# Altium PCB PCB1.PcbDoc (part 4 of 4)
Units mil, origin at the board's own origin, x right, y up, seen from the top; angles counter-clockwise.
Board outline 4724.41 x 4724.41 mil, 4 copper layers (Top Layer, GND, VCC, Bottom Layer); 291 components, 240 nets, 990 pads, 328 vias.
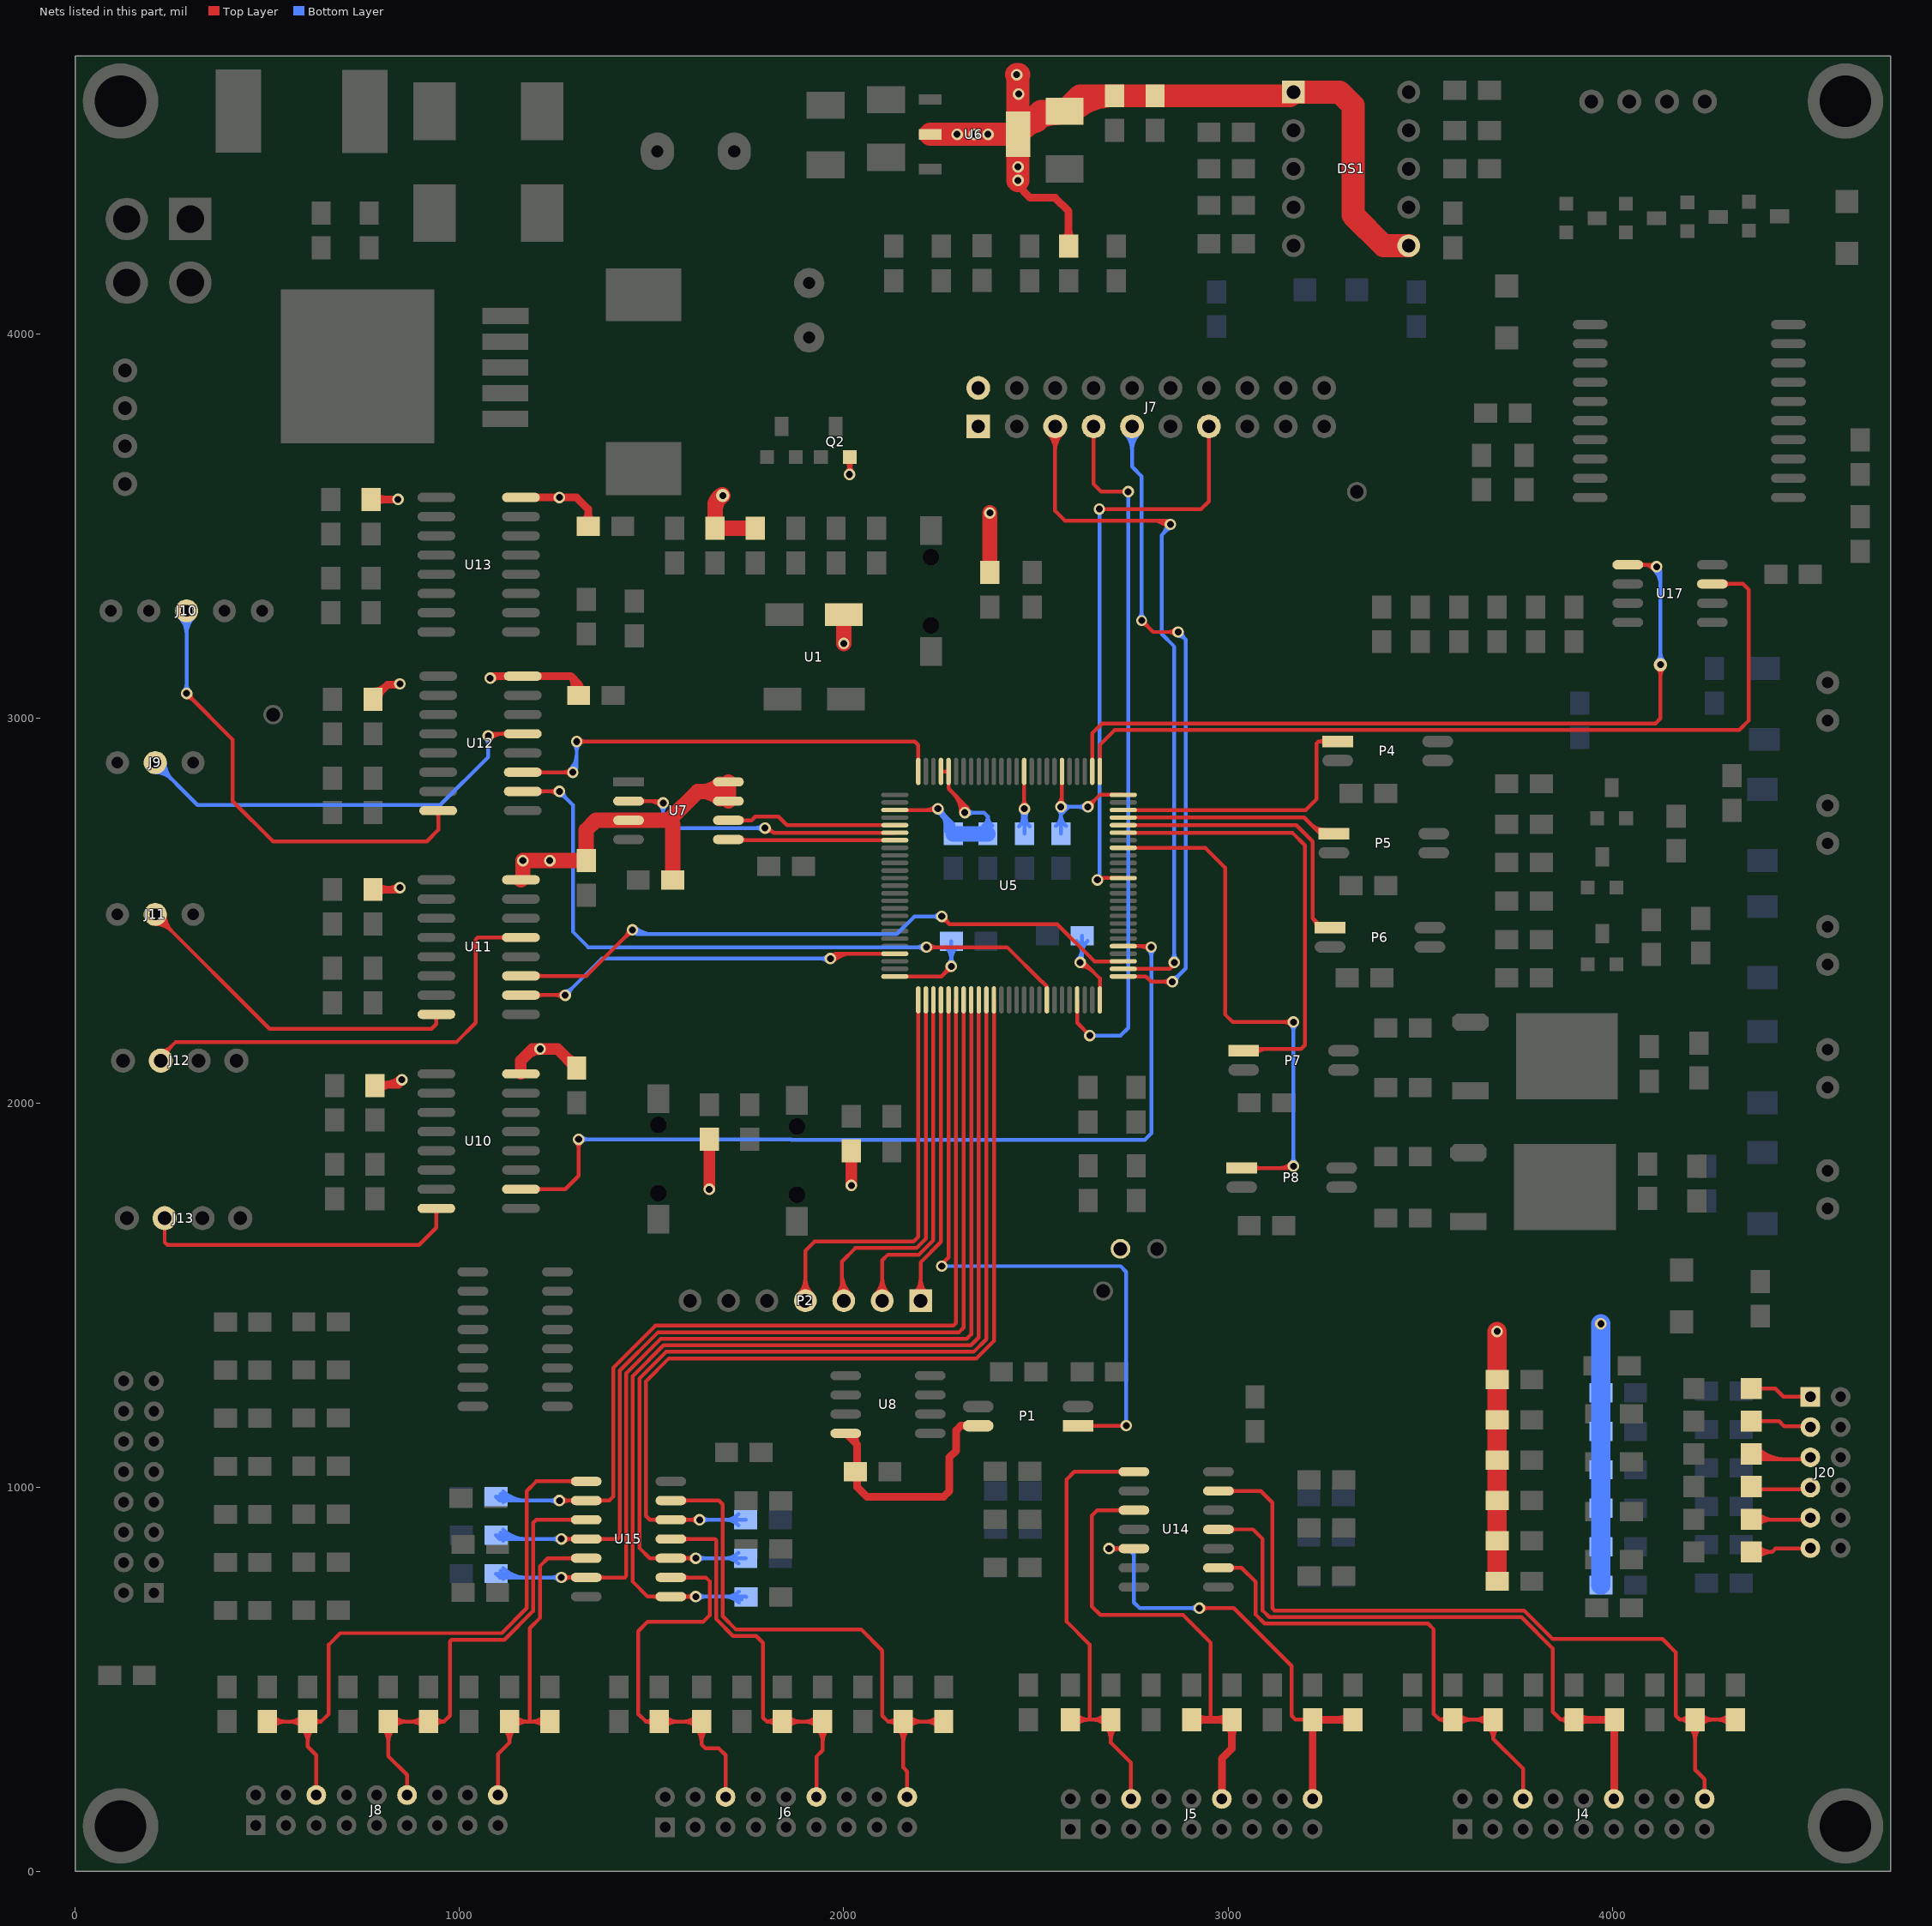
[diagram p6: the nets of this part, all layers, seen from the top]

## Via types
v1: diameter 30, hole 18, Top Layer to Bottom Layer, 301 vias
v2: diameter 35, hole 18, Top Layer to Bottom Layer, 22 vias
v3: diameter 50, hole 28, Top Layer to Bottom Layer, 4 vias
v4: diameter 28, hole 18, Top Layer to Bottom Layer, 1 vias

## Nets (pads, with @x,y where several pads share a name; then routed paths per layer and width w, separated by ;. In a path a pad name is that pad's centre, name@x,y a point inside that pad or via, vN(x,y) a via of type N, cw(c..) or ccw(c..) an arc to the next point about the centre after c; other vN are vias at no path point) (continued)
SENS7: R71.1 U5.61 U15.12 | length 2655.4
  Top Layer w10: U15.12@1517.05,910.05 ccw(c1505.1,898.1) 1505.1,915 ccw(c1505.1,931.9) U15.12@1517.05,919.95 ; U15.12@1582.95,910.05 cw(c1594.9,898.1) 1594.9,915 cw(c1594.9,931.9) U15.12@1582.95,919.95 ; v1@1617.93,907.93 ccw(c1600.86,890.86) 1600.86,915 ccw(c1600.86,939.14) v1@1617.93,922.07 ; v1(1625,915) U15.12@1550,915 1495,915 1485,925 1485,1275 1545,1335 2345,1335 2390.63,1380.63 U5.61@2390.63,2267.76
  Bottom Layer w10: v1(1625,915) R71.1@1745,915 ; v1@1632.07,907.93 cw(c1649.14,890.86) 1649.14,915 cw(c1649.14,939.14) v1@1632.07,922.07 ; R71.1@1725.86,900.86 ccw(c1691.72,866.72) 1691.72,915 ccw(c1691.72,963.28) R71.1@1725.86,929.14
SENS8: R72.1 U5.60 U15.10 | length 2761.4
  Top Layer w10: U15.10@1517.05,810.05 ccw(c1505.1,798.1) 1505.1,815 ccw(c1505.1,831.9) U15.10@1517.05,819.95 ; U15.10@1582.95,810.05 cw(c1594.9,798.1) 1594.9,815 cw(c1594.9,831.9) U15.10@1582.95,819.95 ; v1@1607.93,807.93 ccw(c1590.86,790.86) 1590.86,815 ccw(c1590.86,839.14) v1@1607.93,822.07 ; v1(1615,815) U15.10@1550,815 1495,815 1468,842 1468,1282.04 1537.96,1352 2337.96,1352 2370.94,1384.99 U5.60@2370.94,2267.76
  Bottom Layer w10: v1(1615,815) R72.1@1745,815 ; v1@1622.07,807.93 cw(c1639.14,790.86) 1639.14,815 cw(c1639.14,839.14) v1@1622.07,822.07 ; R72.1@1725.86,800.86 ccw(c1691.72,766.72) 1691.72,815 ccw(c1691.72,863.28) R72.1@1725.86,829.14
SENS9: R73.1 U5.59 U15.8 | length 2892.9
  Top Layer w10: U15.8@1517.05,710.05 ccw(c1505.1,698.1) 1505.1,715 ccw(c1505.1,731.9) U15.8@1517.05,719.95 ; U15.8@1582.95,710.05 cw(c1594.9,698.1) 1594.9,715 cw(c1594.9,731.9) U15.8@1582.95,719.95 ; v1@1607.93,707.93 ccw(c1590.86,690.86) 1590.86,715 ccw(c1590.86,739.14) v1@1607.93,722.07 ; v1(1615,715) U15.8@1550,715 1490,715 1451,754 1451,1289.08 1530.92,1369 2330.92,1369 2351.26,1389.34 U5.59@2351.26,2267.76
  Bottom Layer w10: v1(1615,715) 1745.02,715 R73.1@1745.93,714.09 ; v1@1622.07,707.93 cw(c1639.14,690.86) 1639.14,715 cw(c1639.14,739.14) v1@1622.07,722.07 ; 1690.44,715 cw(c1690.44,663.6) R73.1@1726.79,699.94 ; 1694.85,715 ccw(c1694.85,760.16) R73.1@1726.79,728.23 ; 1714.58,715 cw(c1714.58,687.74) R73.1@1733.86,707.02
SENS10: R74.1 U5.58 U15.6 | length 2959.1
  Top Layer w10: v1(1265,765) U15.6@1330,765 1430,765 1434,769 1434,1296.12 1523.88,1386 2320,1386 2331.57,1397.57 U5.58@2331.57,2267.76 ; v1@1272.07,757.93 cw(c1289.14,740.86) 1289.14,765 cw(c1289.14,789.14) v1@1272.07,772.07 ; U15.6@1297.05,760.05 ccw(c1285.1,748.1) 1285.1,765 ccw(c1285.1,781.9) U15.6@1297.05,769.95 ; U15.6@1362.95,760.05 cw(c1374.9,748.1) 1374.9,765 cw(c1374.9,781.9) U15.6@1362.95,769.95
  Bottom Layer w10: R74.1@1095,775 1105,765 v1(1265,765) ; R74.1@1100,775 ccw(c1124.14,799.14) 1124.14,765 ccw(c1124.14,750.86) R74.1@1114.14,760.86 ; R74.1@1107.07,782.07 ccw(c1148.28,823.28) 1148.28,765 ; R74.1@1114.14,789.14 ccw(c1172.43,847.43) 1172.43,765 ; v1@1257.93,757.93 ccw(c1240.86,740.86) 1240.86,765 ccw(c1240.86,789.14) v1@1257.93,772.07
SENS11: R75.1 U5.57 U15.4 | length 2832.8
  Top Layer w10: v1(1265,865) U15.4@1330,865 1412,865 1417,870 1417,1303.17 1516.83,1403 2300,1403 2311.89,1414.89 U5.57@2311.89,2267.76 ; v1@1272.07,857.93 cw(c1289.14,840.86) 1289.14,865 cw(c1289.14,889.14) v1@1272.07,872.07 ; U15.4@1297.05,860.05 ccw(c1285.1,848.1) 1285.1,865 ccw(c1285.1,881.9) U15.4@1297.05,869.95 ; U15.4@1362.95,860.05 cw(c1374.9,848.1) 1374.9,865 cw(c1374.9,881.9) U15.4@1362.95,869.95
  Bottom Layer w10: R75.1@1095,875 1105,865 v1(1265,865) ; R75.1@1100,875 ccw(c1124.14,899.14) 1124.14,865 ccw(c1124.14,850.86) R75.1@1114.14,860.86 ; R75.1@1107.07,882.07 ccw(c1148.28,923.28) 1148.28,865 ; R75.1@1114.14,889.14 ccw(c1172.43,947.43) 1172.43,865 ; v1@1257.93,857.93 ccw(c1240.86,840.86) 1240.86,865 ccw(c1240.86,889.14) v1@1257.93,872.07
SENS12: R76.1 U5.56 U15.2 | length 2707.1
  Top Layer w10: v1(1260,965) U15.2@1330,965 1390,965 1400,975 1400,1310.21 1509.79,1420 2285,1420 2292.2,1427.2 U5.56@2292.2,2267.76 ; v1@1267.07,957.93 cw(c1284.14,940.86) 1284.14,965 cw(c1284.14,989.14) v1@1267.07,972.07 ; U15.2@1297.05,960.05 ccw(c1285.1,948.1) 1285.1,965 ccw(c1285.1,981.9) U15.2@1297.05,969.95 ; U15.2@1362.95,960.05 cw(c1374.9,948.1) 1374.9,965 cw(c1374.9,981.9) U15.2@1362.95,969.95
  Bottom Layer w10: R76.1@1095,975 1105,965 v1(1260,965) ; R76.1@1100,975 ccw(c1124.14,999.14) 1124.14,965 ccw(c1124.14,950.86) R76.1@1114.14,960.86 ; R76.1@1107.07,982.07 ccw(c1148.28,1023.28) 1148.28,965 ; R76.1@1114.14,989.14 ccw(c1172.43,1047.43) 1172.43,965 ; v1@1252.93,957.93 ccw(c1235.86,940.86) 1235.86,965 ccw(c1235.86,989.14) v1@1252.93,972.07
SENS_POWER: P1.1 U5.55 | length 1715.3
  Top Layer w10: v1@2250,1575 v1(2255,1575) ; v1@2252.5,1577.5 2272.52,1597.52 U5.55@2272.52,2267.76 ; P1.1@2609.69,1159.57 2734.57,1159.57 v1(2735,1160)
  Bottom Layer w10: v1(2255,1575) 2720,1575 2735,1560 v1(2735,1160)
SENSER1: C42.1 J4.18 R42.2 U14.13 | length 2375.5
  Top Layer w10: U14.13@2975,990 3085,990 3115,960 3115,685 3121,679 3770.04,679 3844.04,605 4130,605 4165,570 4165,405 4175,395 ; U14.13@3007.95,985.05 cw(c3019.9,973.1) 3019.9,990 cw(c3019.9,1006.9) U14.13@3007.95,994.95 ; R42.2@4199,383 ccw(c4175,365) 4175,395 ; R42.2@4199,407 cw(c4175,425) 4175,395 ; R42.2@4200.86,375.86 cw(c4166.72,341.72) 4215,341.72 cw(c4263.28,341.72) R42.2@4229.14,375.86 ; R42.2@4229.14,380.86 cw(c4263.28,346.72) 4263.28,395 cw(c4263.28,443.28) R42.2@4229.14,409.14 ; J4.18@4239.92,188.74 4239.92,240.08 4215,265 R42.2@4215,395 ; C42.1@4305.86,380.86 ccw(c4271.72,346.72) 4271.72,395 ccw(c4271.72,443.28) C42.1@4305.86,409.14 ; C42.1@4320,395 R42.2@4215,395 ; 4175,395 R42.2@4215,395
SENSER2: C46.1 J4.12 R40.2 U14.11 | length 1781.9
  Top Layer w10: U14.11@2975,890 3065,890 3090,865 3090,679 3107,662 3763,662 3845,580 3845,415 3865,395 ; U14.11@3007.95,885.05 cw(c3019.9,873.1) 3019.9,890 cw(c3019.9,906.9) U14.11@3007.95,894.95 ; R40.2@3882.77,384.85 ccw(c3865,374.38) 3865,395 ; R40.2@3882.77,405.15 cw(c3865,415.62) 3865,395 ; R40.2@3900,395 3865,395
  Top Layer w20: R40.2@3900,395 C46.1@4005,395 J4.12@4005,180 ; R40.2@3910.61,384.39 cw(c3936.21,358.79) 3936.21,395 cw(c3936.21,431.21) R40.2@3910.61,405.61
SENSER3: C38.1 J4.6 R38.2 U14.9 | length 1584.6
  Top Layer w10: U14.9@2975,790 3035,790 3072,753 3072,668 3095,645 3520,645 3535,630 3535,410 3550,395 ; U14.9@3007.95,785.05 cw(c3019.9,773.1) 3019.9,790 cw(c3019.9,806.9) U14.9@3007.95,794.95 ; R38.2@3567.77,384.85 ccw(c3550,374.38) 3550,395 ; R38.2@3567.77,405.15 cw(c3550,415.62) 3550,395 ; R38.2@3599.14,380.86 cw(c3633.28,346.72) 3633.28,395 cw(c3633.28,443.28) R38.2@3599.14,409.14 ; C38.1@3675.86,380.86 ccw(c3641.72,346.72) 3641.72,395 ccw(c3641.72,443.28) C38.1@3675.86,409.14 ; C38.1@3676.6,375.15 cw(c3649.38,345) 3690,345 ; C38.1@3703.4,375.15 ccw(c3730.62,345) 3690,345 ; J4.6@3767.48,188.74 3767.48,267.52 3690,345 ; 3550,395 R38.2@3585,395 C38.1@3690,395 3690,345
SENSER4: C43.1 J5.18 R36.2 U14.5 | length 1479.5
  Top Layer w10: v1(2690,840) U14.5@2755,840 ; v1@2697.07,832.93 cw(c2714.14,815.86) 2714.14,840 cw(c2714.14,864.14) v1@2697.07,847.07 ; U14.5@2722.05,835.05 ccw(c2710.1,823.1) 2710.1,840 ccw(c2710.1,856.9) U14.5@2722.05,844.95 ; v1(2925,685) 3015,685 3165,535 3165,405 3175,395 R36.2@3220,395 ; v1@2932.07,677.93 cw(c2949.14,660.86) 2949.14,685 cw(c2949.14,709.14) v1@2932.07,692.07
  Top Layer w20: J5.18@3214.92,186.38 3220,191.46 R36.2@3220,395 C43.1@3325,395 ; C43.1@3314.39,384.39 ccw(c3288.79,358.79) 3288.79,395 ccw(c3288.79,431.21) C43.1@3314.39,405.61
  Bottom Layer w10: v1(2690,840) 2740,840 2755,825 2755,700 2770,685 v1(2925,685) ; v1@2697.07,832.93 cw(c2714.14,815.86) 2714.14,840 cw(c2714.14,864.14) v1@2697.07,847.07 ; v1@2917.93,677.93 ccw(c2900.86,660.86) 2900.86,685 ccw(c2900.86,709.14) v1@2917.93,692.07
SENSER5: C47.1 J5.12 R34.2 U14.3 | length 1419.9
  Top Layer w10: U14.3@2722.05,935.05 ccw(c2710.1,923.1) 2710.1,940 ccw(c2710.1,956.9) U14.3@2722.05,944.95 ; U14.3@2755,940 2660,940 2645,925 2645,690 2667.5,667.5 2882.5,667.5 2955,595 2955,395
  Top Layer w20: R34.2@2905,395 2955,395 C47.1@3010,395 3010,320 2983.7,293.7 J5.12@2983.7,188.74 ; R34.2@2915.61,384.39 cw(c2941.21,358.79) 2941.21,395 cw(c2941.21,431.21) R34.2@2915.61,405.61 ; C47.1@2999.39,379.39 cw(c2973.79,353.79) 3010,353.79 cw(c3046.21,353.79) C47.1@3020.61,379.39 ; C47.1@2999.39,384.39 ccw(c2973.79,358.79) 2973.79,395 ccw(c2973.79,431.21) C47.1@2999.39,405.61
SENSER6: C39.1 J5.6 R32.2 U14.1 | length 1420.2
  Top Layer w10: R32.2@2590,395 2640,395 ; R32.2@2604.14,380.86 cw(c2638.28,346.72) 2638.28,395 cw(c2638.28,443.28) R32.2@2604.14,409.14 ; C39.1@2680.86,375.86 cw(c2646.72,341.72) 2695,341.72 cw(c2743.28,341.72) C39.1@2709.14,375.86 ; C39.1@2680.86,380.86 ccw(c2646.72,346.72) 2646.72,395 ccw(c2646.72,443.28) C39.1@2680.86,409.14 ; U14.1@2722.05,1035.05 ccw(c2710.1,1023.1) 2710.1,1040 ccw(c2710.1,1056.9) U14.1@2722.05,1044.95 ; J5.6@2747.48,188.74 2747.48,282.52 2695,335 C39.1@2695,395 2640,395 ; U14.1@2755,1040 2600,1040 2580,1020 2580,650 2640,590 2640,395
SENSER7: C44.1 J6.18 R30.2 U15.13 | length 1728.3
  Top Layer w10: U15.13@1550,965 1675,965 1685,955 1685,664.04 1719.04,630 2045,630 2100,575 2100,405 2115,390 ; U15.13@1582.95,960.05 cw(c1594.9,948.1) 1594.9,965 cw(c1594.9,981.9) U15.13@1582.95,969.95 ; R30.2@2139,378 ccw(c2115,360) 2115,390 ; R30.2@2139,402 cw(c2115,420) 2115,390 ; R30.2@2140.86,370.86 cw(c2106.72,336.72) 2155,336.72 cw(c2203.28,336.72) R30.2@2169.14,370.86 ; J6.18@2164.92,193.74 2164.92,260.08 2155,270 R30.2@2155,390 ; R30.2@2169.14,375.86 cw(c2203.28,341.72) 2203.28,390 cw(c2203.28,438.28) R30.2@2169.14,404.14 ; C44.1@2245.86,375.86 ccw(c2211.72,341.72) 2211.72,390 ccw(c2211.72,438.28) C44.1@2245.86,404.14 ; C44.1@2260,390 R30.2@2155,390 ; 2115,390 R30.2@2155,390
SENSER8: C48.1 J6.12 R28.2 U15.11 | length 1338.8
  Top Layer w10: U15.11@1550,865 1665,865 1668,862 1668,657 1712,613 1772,613 1790,595 1790,400 1800,390 ; U15.11@1582.95,860.05 cw(c1594.9,848.1) 1594.9,865 cw(c1594.9,881.9) U15.11@1582.95,869.95 ; R28.2@1824,378 ccw(c1800,360) 1800,390 ; R28.2@1824,402 cw(c1800,420) 1800,390 ; R28.2@1854.14,375.86 cw(c1888.28,341.72) 1888.28,390 cw(c1888.28,438.28) R28.2@1854.14,404.14 ; J6.12@1928.7,193.74 1928.7,298.7 1945,315 C48.1@1945,390 R28.2@1840,390 1800,390 ; C48.1@1930.86,370.86 cw(c1896.72,336.72) 1945,336.72 cw(c1993.28,336.72) C48.1@1959.14,370.86 ; C48.1@1930.86,375.86 ccw(c1896.72,341.72) 1896.72,390 ccw(c1896.72,438.28) C48.1@1930.86,404.14
SENSER9: C40.1 J6.6 R26.2 U15.9 | length 1325
  Top Layer w10: R26.2@1502.77,379.85 ccw(c1485,369.38) 1485,390 ; R26.2@1502.77,400.15 cw(c1485,410.62) 1485,390 ; R26.2@1534.14,375.86 cw(c1568.28,341.72) 1568.28,390 cw(c1568.28,438.28) R26.2@1534.14,404.14 ; U15.9@1550,765 1641,765 1651,755 1651,666 1635,650 1490,650 1465,625 1465,410 1485,390 ; U15.9@1582.95,760.05 cw(c1594.9,748.1) 1594.9,765 cw(c1594.9,781.9) U15.9@1582.95,769.95 ; C40.1@1615.86,370.86 cw(c1581.72,336.72) 1630,336.72 cw(c1678.28,336.72) C40.1@1644.14,370.86 ; C40.1@1615.86,375.86 ccw(c1581.72,341.72) 1581.72,390 ccw(c1581.72,438.28) C40.1@1615.86,404.14 ; J6.6@1692.48,193.74 1692.48,302.52 1675,320 1640,320 1630,330 C40.1@1630,390 R26.2@1520,390 1485,390
SENSER10: C45.1 J8.18 R48.2 U15.5 | length 1112.8
  Top Layer w10: J8.18@1099.92,193.45 1099.92,304.92 1130,335 R48.2@1130,390 1182.5,390 ; R48.2@1115.86,370.86 cw(c1081.72,336.72) 1130,336.72 cw(c1178.28,336.72) R48.2@1144.14,370.86 ; R48.2@1144.14,375.86 cw(c1178.28,341.72) 1178.28,390 cw(c1178.28,438.28) R48.2@1144.14,404.14 ; C45.1@1220.86,375.86 ccw(c1186.72,341.72) 1186.72,390 ccw(c1186.72,438.28) C45.1@1220.86,404.14 ; C45.1@1235,390 1182.5,390 ; U15.5@1297.05,810.05 ccw(c1285.1,798.1) 1285.1,815 ccw(c1285.1,831.9) U15.5@1297.05,819.95 ; U15.5@1330,815 1230,815 1210,795 1210,660 1182.5,632.5 1182.5,390
SENSER11: C49.1 J8.12 R46.2 U15.3 | length 1500.8
  Top Layer w10: R46.2@800.86,370.86 cw(c766.72,336.72) 815,336.72 cw(c863.28,336.72) R46.2@829.14,370.86 ; R46.2@829.14,375.86 cw(c863.28,341.72) 863.28,390 cw(c863.28,438.28) R46.2@829.14,404.14 ; J8.12@863.7,198.74 863.7,251.3 815,300 R46.2@815,390 C49.1@920,390 960,390 ; C49.1@905.86,375.86 ccw(c871.72,341.72) 871.72,390 ccw(c871.72,438.28) C49.1@905.86,404.14 ; C49.1@936,378 cw(c960,360) 960,390 ; C49.1@936,402 ccw(c960,420) 960,390 ; U15.3@1297.05,910.05 ccw(c1285.1,898.1) 1285.1,915 ccw(c1285.1,931.9) U15.3@1297.05,919.95 ; U15.3@1330,915 1200,915 1192,907 1192,677.96 1117.04,603 980,603 975,598 975,405 960,390
SENSER12: C41.1 J8.6 R44.2 U15.1 | length 1870.5
  Top Layer w10: R44.2@500,390 C41.1@605,390 ; R44.2@514.14,375.86 cw(c548.28,341.72) 548.28,390 cw(c548.28,438.28) R44.2@514.14,404.14 ; C41.1@590.86,370.86 cw(c556.72,336.72) 605,336.72 cw(c653.28,336.72) C41.1@619.14,370.86 ; C41.1@590.86,375.86 ccw(c556.72,341.72) 556.72,390 ccw(c556.72,438.28) C41.1@590.86,404.14 ; C41.1@622.23,379.85 cw(c640,369.38) 640,390 ; C41.1@622.23,400.15 ccw(c640,410.62) 640,390 ; J8.6@627.48,198.74 627.48,302.52 605,325 C41.1@605,390 ; U15.1@1297.05,1010.05 ccw(c1285.1,998.1) 1285.1,1015 ccw(c1285.1,1031.9) U15.1@1297.05,1019.95 ; U15.1@1330,1015 1200,1015 1175,990 1175,685 1110,620 690,620 660,590 660,410 640,390 ; C41.1@605,390 640,390
SOLE-1: P4.1 U5.98 | length 764.4
  Top Layer w10: U5.98@2727.24,2761.85 3201.85,2761.85 3230,2790 3230,2935 3235,2940 P4.1@3295,2940 ; 3235.14,2940 ccw(c3235.14,2965.6) P4.1@3253.24,2947.5 ; 3237.2,2940 cw(c3237.2,2917.31) P4.1@3253.24,2933.36
SOLE-2: P5.1 U5.97 | length 634.9
  Top Layer w10: U5.97@2727.24,2742.17 3197.83,2742.17 3240,2700 P5.1@3285,2700 ; 3214.91,2725.09 ccw(c3250.31,2760.5) P5.1@3250.31,2710.43 ; 3231.98,2708.02 ccw(c3250.31,2726.36) P5.1@3250.31,2700.43
SOLE-3: P6.1 U5.96 | length 816.6
  Top Layer w10: U5.96@2727.24,2722.48 3177.52,2722.48 3220,2680 3220,2480 3240,2460 P6.1@3280,2460 ; 3220.23,2479.77 cw(c3195.89,2455.43) P6.1@3230.31,2455.43 ; P6.1@3230.51,2469.49 ccw(c3240.31,2479.29) P6.1@3240.31,2465.43
SOLE-4: P7.1 U5.95 | length 1201.7
  Top Layer w10: U5.95@2727.24,2702.8 3167.2,2702.8 3200,2670 3200,2150 3190,2140 P7.1@3040,2140 ; P7.1@3072.39,2128.36 cw(c3100.5,2100.24) 3100.5,2140
SOLE-5: P8.1 U5.93 | length 1550.5
  Top Layer w10: U5.93@2727.24,2663.43 2940.62,2663.43 2992,2612.04 2992,2230 3012,2210 v1(3170,2210) ; P8.1@3035,1830 3165,1830 v1(3170,1835) ; P8.1@3067.39,1823.36 cw(c3083.43,1807.31) 3083.43,1830 ; P8.1@3067.39,1837.5 ccw(c3085.49,1855.6) 3085.49,1830 ; 3133.79,1830 ccw(c3133.79,1871.21) v1@3162.93,1842.07 ; v1@3162.93,2202.93 ccw(c3145.86,2185.86) 3145.86,2210 ccw(c3145.86,2234.14) v1@3162.93,2217.07
  Bottom Layer w10: v1@3162.93,1842.07 ccw(c3145.86,1859.14) 3170,1859.14 ccw(c3194.14,1859.14) v1@3177.07,1842.07 ; v1@3162.93,2202.93 cw(c3145.86,2185.86) 3170,2185.86 cw(c3194.14,2185.86) v1@3177.07,2202.93 ; v1(3170,1835) v1(3170,2210)
SP: P1.4 R12.2 U8.4 | length 674.7
  Top Layer w20: U8.4@2005,1140 2035,1110 ; U8.4@2034.47,1138.64 ccw(c2049.6,1124.6) 2035,1110 ; R12.2@2040,1045 R12.2@2035,1040 ; P1.4@2349.69,1159.57 2304.57,1159.57 2292.5,1147.5 2292.5,1095 2275,1077.5 2275,990 2260,975 2060,975 2035,1000 R12.2@2035,1040 ; R12.2@2035,1040 2035,1110
SPI1_MISO: U5.31 U7.2 | length 910.3
  Top Layer w10: U7.2@1440,2785 1525,2785 v1(1530,2780) ; U7.2@1472.95,2780.05 cw(c1484.9,2768.1) 1484.9,2785 cw(c1484.9,2801.9) U7.2@1472.95,2789.95 ; 1493.79,2785 cw(c1493.79,2743.79) v1@1522.93,2772.93 ; v1(1795,2715) 1805,2715 1817.2,2702.8 ; v1@1799.24,2705.95 cw(c1805.98,2691.57) 1817.2,2702.8 ; U5.31@2132.76,2702.8 1817.2,2702.8
  Bottom Layer w10: v1@1522.93,2772.93 cw(c1505.86,2755.86) 1530,2755.86 cw(c1554.14,2755.86) v1@1537.07,2772.93 ; v1(1530,2780) 1530,2730 1545,2715 v1(1795,2715) ; v1@1787.93,2707.93 ccw(c1770.86,2690.86) 1770.86,2715 ccw(c1770.86,2739.14) v1@1787.93,2722.07
SPI1_MOSI: U5.32 U7.5 | length 460.7
  Top Layer w10: U7.5@1699.84,2680 1702.95,2683.11 U5.32@2132.76,2683.11 ; U7.5@1732.79,2680.05 cw(c1740.18,2672.66) 1740.18,2683.11 ; U7.5@1732.79,2689.95 ccw(c1749.3,2706.46) 1749.3,2683.11
SPI1_SCK: U5.30 U7.6 | length 472.9
  Top Layer w10: U7.6@1699.84,2735 1760,2735 1770,2745 1830,2745 1852.52,2722.48 U5.30@2132.76,2722.48 ; U7.6@1732.79,2730.05 cw(c1744.74,2718.1) 1744.74,2735 cw(c1744.74,2751.9) U7.6@1732.79,2739.95
SPI2_MISO: P2.2 U5.53 | length 1033.4
  Top Layer w10: P2.2@2082.66,1502.34 ccw(c2040.79,1544.21) 2100,1544.21 ccw(c2159.21,1544.21) P2.2@2117.34,1502.34 ; P2.2@2089.73,1495.27 ccw(c2064.93,1520.07) 2100,1520.07 ccw(c2135.07,1520.07) P2.2@2110.27,1495.27 ; P2.2@2100,1485 2100,1590 2115,1605 2195.96,1605 2233.15,1642.19 U5.53@2233.15,2267.76
SPI2_MOSI: P2.1 U5.54 | length 952.7
  Top Layer w10: P2.1@2182.66,1502.34 ccw(c2140.79,1544.21) 2200,1544.21 ccw(c2259.21,1544.21) P2.1@2217.34,1502.34 ; P2.1@2189.73,1495.27 ccw(c2164.93,1520.07) 2200,1520.07 ccw(c2235.07,1520.07) P2.1@2210.27,1495.27 ; P2.1@2200,1485 2200,1585 2252.83,1637.83 U5.54@2252.83,2267.76
SPI2_NSS: P2.4 U5.51 | length 1203.6
  Top Layer w10: P2.4@1882.66,1502.34 ccw(c1840.79,1544.21) 1900,1544.21 ccw(c1959.21,1544.21) P2.4@1917.34,1502.34 ; P2.4@1889.73,1495.27 ccw(c1864.93,1520.07) 1900,1520.07 ccw(c1935.07,1520.07) P2.4@1910.27,1495.27 ; P2.4@1900,1485 1900,1615 1924,1639 2181.88,1639 2193.78,1650.9 U5.51@2193.78,2267.76
SPI2_SCK: P2.3 U5.52 | length 1082.4
  Top Layer w10: P2.3@1982.66,1502.34 ccw(c1952.86,1532.14) 1995,1532.14 ccw(c2047.14,1532.14) P2.3@2010.27,1495.27 ; P2.3@1995,1490 P2.3@2000,1485 ; P2.3@1995,1510 1995,1587 2030,1622 2188.92,1622 2213.46,1646.55 U5.52@2213.46,2267.76 ; 1995,1556.29 ccw(c2071.29,1556.29) P2.3@2017.34,1502.34
SWITCH1: D44.K J20.11 | length 236.6
  Top Layer w10: D44.K@4370.08,822.5 cw(c4391.52,801.06) 4391.52,831.38 cw(c4391.52,861.7) D44.K@4370.08,840.26 ; D44.K@4377.15,815.43 cw(c4415.66,776.92) 4415.66,831.38 ; D44.K@4377.15,847.33 ccw(c4415.66,885.84) 4415.66,831.38 ; J20.11@4515,841.3 4513.7,840 4424.28,840 4415.66,831.38
SWITCH2: D45.K J20.9 | length 219.5
  Top Layer w10: D45.K@4361.2,916.38 D45.K@4362.54,915.04 ; D45.K@4370.08,925.26 ccw(c4394.76,949.94) 4394.76,915.04 ; D45.K@4377.15,900.43 cw(c4412.42,865.16) 4412.42,915.04 4510,915.04 J20.9@4515,920.04 ; D45.K@4377.15,932.33 ccw(c4418.9,974.08) 4418.9,915.04
SWITCH3: D46.K J20.7 | length 157.6
  Top Layer w10: D46.K@4361.2,1001.38 4368.8,993.78 4515.22,993.78 J20.7@4515.5,994.05
SWITCH4: D47.K J20.5 | length 352.5
  Top Layer w10: D47.K@4361.2,1086.38 4375.06,1072.52 J20.5@4525,1072.52 ; D47.K@4363.01,1088.19 ccw(c4400.84,1126.02) 4400.84,1072.52 ; D47.K@4370.08,1095.26 ccw(c4424.98,1150.17) 4424.98,1072.52 ; D47.K@4377.15,1102.33 ccw(c4449.13,1174.31) 4449.13,1072.52
SWITCH5: D48.K J20.3 | length 160.3
  Top Layer w10: D48.K@4361.2,1171.38 4433.62,1171.38 4446.8,1158.2 J20.3@4516,1158.2
SWITCH6: D49.K J20.1 | length 162.7
  Top Layer w10: D49.K@4361.2,1256.38 4423.62,1256.38 4445,1235 J20.1@4515,1235
TCK: J7.9 U5.76 | length 2068.3
  Top Layer w10: U5.76@2727.24,2328.78 2786.22,2328.78 2800,2315 v1(2855,2315) ; v4@2775,3246 cw(c2775,3224.27) 2790.36,3239.64 cw(c2805.73,3255) v4@2784,3255 ; v4(2775,3255) 2805,3225 v1(2870,3225) ; v1@2847.93,2307.93 ccw(c2830.86,2290.86) 2830.86,2315 ccw(c2830.86,2339.14) v1@2847.93,2322.07 ; v1@2862.93,3217.93 ccw(c2845.86,3200.86) 2845.86,3225 ccw(c2845.86,3249.14) v1@2862.93,3232.07
  Bottom Layer w10: J7.9@2731.62,3741.62 cw(c2687.23,3697.23) 2750,3697.23 cw(c2812.77,3697.23) J7.9@2768.38,3741.62 ; J7.9@2738.69,3748.69 cw(c2711.37,3721.37) 2750,3721.37 cw(c2788.63,3721.37) J7.9@2761.31,3748.69 ; J7.9@2750,3760 2750,3655 2775,3630 v4(2775,3255) ; v4@2768.64,3261.36 ccw(c2753.27,3276.73) 2775,3276.73 ccw(c2796.73,3276.73) v4@2781.36,3261.36 ; v1(2855,2315) 2890,2350 2890,3205 v1(2870,3225) ; v1@2855,2325 ccw(c2855,2349.14) 2872.07,2332.07 ccw(c2889.14,2315) v1@2865,2315 ; v1@2870,3215 cw(c2870,3190.86) 2887.07,3207.93 cw(c2904.14,3225) v1@2880,3225
TDI: J7.5 U5.77 | length 2166
  Top Layer w10: J7.5@2531.62,3741.62 cw(c2487.23,3697.23) 2550,3697.23 cw(c2612.77,3697.23) J7.5@2568.38,3741.62 ; J7.5@2538.69,3748.69 cw(c2511.37,3721.37) 2550,3721.37 cw(c2588.63,3721.37) J7.5@2561.31,3748.69 ; J7.5@2550,3760 2550,3540 2575,3515 2840,3515 v1(2850,3505) ccw(c2825.86,3480.86) 2825.86,3515 ; U5.77@2727.24,2348.46 2848.46,2348.46 ; 2801.72,3515 cw(c2801.72,3456.72) v1@2842.93,3497.93 ; v1@2850.84,2361 cw(c2840.46,2356.47) 2848.47,2348.47 ; 2851.46,2351.46 cw(c2860,2342.93) v1@2860,2355 ; v1(2860,2365) 2865,2365 2848.46,2348.46
  Bottom Layer w10: 2829.39,3479.39 ccw(c2803.79,3505) v1@2840,3505 ; 2841.46,3491.46 cw(c2850,3482.93) v1@2850,3495 ; v1@2845,3495 2827,3477 2827,3220 2860,3187 v1(2860,2365) ; v1@2852.93,2372.07 ccw(c2835.86,2389.14) 2860,2389.14 ccw(c2884.14,2389.14) v1@2867.07,2372.07
TDO: J7.13 U5.89 | length 1524.5
  Top Layer w10: v1(2660,2580) 2664.69,2584.68 U5.89@2727.24,2584.68 ; v1(2665,3545) 2930,3545 2950,3565 J7.13@2950,3760
  Bottom Layer w10: v1(2660,2580) 2665,2585 v1(2665,3545)
TMS: J7.7 U5.72 | length 1857.9
  Top Layer w10: U5.72@2607.17,2267.76 2607.17,2207.83 v1(2640,2175) ; J7.7@2650,3760 2650,3610 2670,3590 v1(2740,3590)
  Bottom Layer w10: v1(2640,2175) 2720,2175 2740,2195 v1(2740,3590)
TXD1: U5.68 U12.10 | length 1992.9
  Top Layer w10: U12.10@1164.83,2810.14 v1(1260,2810.14) ; U12.10@1206.99,2805.19 cw(c1218.94,2793.24) 1218.94,2810.14 cw(c1218.94,2827.04) U12.10@1206.99,2815.09 ; v1@1252.93,2803.07 ccw(c1235.86,2786) 1235.86,2810.14 ccw(c1235.86,2834.28) v1@1252.93,2817.21 ; v1(2215,2405) 2425,2405 2514.81,2315.19 2516.16,2315.19 2528.43,2302.92 U5.68@2528.43,2267.76 ; v1@2222.07,2397.93 cw(c2239.14,2380.86) 2239.14,2405 cw(c2239.14,2429.14) v1@2222.07,2412.07 ; 2522.89,2308.45 cw(c2511.72,2297.28) U5.68@2527.52,2297.28
  Bottom Layer w10: v1@1260,2800.14 cw(c1260,2776) 1277.07,2793.07 cw(c1294.14,2810.14) v1@1270,2810.14 ; v1(1260,2810.14) 1295,2775.14 1295,2445 1335,2405 v1(2215,2405) ; v1@2207.93,2397.93 ccw(c2190.86,2380.86) 2190.86,2405 ccw(c2190.86,2429.14) v1@2207.93,2412.07
TXD2: U5.25 U12.11 | length 1388.7
  Top Layer w10: U12.11@1164.83,2860.14 1164.97,2860 v1(1295,2860) ; U12.11@1206.99,2855.19 cw(c1218.6,2843.58) 1218.6,2860 ; U12.11@1206.99,2865.09 ccw(c1219.28,2877.38) 1219.28,2860 ; v1@1287.93,2852.93 ccw(c1270.86,2835.86) 1270.86,2860 ccw(c1270.86,2884.14) v1@1287.93,2867.07 ; v1(1305,2940) 2185,2940 2193.78,2931.22 U5.25@2193.78,2862.24 ; v1@1312.07,2932.93 cw(c1329.14,2915.86) 1329.14,2940 cw(c1329.14,2964.14) v1@1312.07,2947.07
  Bottom Layer w10: v1@1287.93,2867.07 ccw(c1246.72,2908.28) 1305,2908.28 ; v1@1297.93,2932.93 cw(c1280.86,2915.86) 1305,2915.86 cw(c1329.14,2915.86) v1@1312.07,2932.93 ; 1305,2884.14 cw(c1270.86,2884.14) v1(1295,2860) 1305,2870 v1(1305,2940)
TXD3: U5.47 U11.10 | length 1268.9
  Top Layer w10: U11.10@1159.83,2280.14 1274.86,2280.14 v1(1275,2280) ; U11.10@1201.99,2275.19 cw(c1213.94,2263.24) 1213.94,2280.14 cw(c1213.94,2297.04) U11.10@1201.99,2285.09 ; 1250.52,2280.14 cw(c1250.52,2255.52) v1@1267.93,2272.93 ; 1251.2,2280.14 ccw(c1251.2,2303.8) v1@1267.93,2287.07 ; v1@1967.2,2384.76 ccw(c1969.72,2395.95) 1977.83,2387.83 ; v1@1972.07,2367.93 cw(c2020.13,2319.87) 2020.13,2387.83 ; v1@1974.76,2377.2 cw(c1985.95,2379.72) 1977.83,2387.83 ; 1995.99,2387.83 ccw(c1995.99,2344.01) v1(1965,2375) 1977.83,2387.83 ; U5.47@2132.76,2387.83 1977.83,2387.83
  Bottom Layer w10: v1(1275,2280) 1370,2375 v1(1965,2375) ; v1@1275,2290 ccw(c1275,2314.14) 1292.07,2297.07 ccw(c1309.14,2280) v1@1285,2280 ; v1@1957.93,2367.93 ccw(c1940.86,2350.86) 1940.86,2375 ccw(c1940.86,2399.14) v1@1957.93,2382.07
TXD4: U5.78 U11.11 | length 1900.3
  Top Layer w10: U11.11@1159.83,2330.14 1330.14,2330.14 v1(1450,2450) ; U11.11@1201.99,2325.19 cw(c1213.94,2313.24) 1213.94,2330.14 cw(c1213.94,2347.04) U11.11@1201.99,2335.09 ; v1@1440,2450 cw(c1415.86,2450) 1432.93,2432.93 cw(c1450,2415.86) v1@1450,2440 ; v1@2255,2475 cw(c2255,2450.86) 2272.07,2467.93 cw(c2289.14,2485) v1@2265,2485 ; v1(2255,2485) 2275,2465 2555,2465 2651.85,2368.15 U5.78@2727.24,2368.15
  Bottom Layer w10: v1(1450,2450) ccw(c1476.56,2476.56) 1476.56,2439 ; v1@1455,2445 1461,2439 2137.96,2439 2183.96,2485 v1(2255,2485) ; v1@1457.07,2457.07 ccw(c1500.7,2500.7) 1500.7,2439 ; v1@2247.93,2477.93 ccw(c2230.86,2460.86) 2230.86,2485 ccw(c2230.86,2509.14) v1@2247.93,2492.07
TXD5: U5.80 U10.10 | length 2488.6
  Top Layer w10: U10.10@1159.83,1775.14 1275.14,1775.14 1310,1810 v1(1310,1905) ; U10.10@1201.99,1770.19 cw(c1213.94,1758.24) 1213.94,1775.14 cw(c1213.94,1792.04) U10.10@1201.99,1780.09 ; v1@1302.93,1897.93 cw(c1285.86,1880.86) 1310,1880.86 cw(c1334.14,1880.86) v1@1317.07,1897.93 ; U5.80@2727.24,2407.52 2797.48,2407.52 v1(2800,2405) ; 2769.77,2407.52 cw(c2769.77,2374.77) v1@2792.93,2397.93 ; 2781.94,2407.52 ccw(c2781.94,2423.06) v1@2792.93,2412.07
  Bottom Layer w10: v1@1315,1905 1862.84,1905 1863.78,1904.06 2784.06,1904.06 2800,1920 v1(2800,2405) ; v1@1317.07,1897.93 cw(c1334.14,1880.86) 1334.14,1905 cw(c1334.14,1929.14) v1@1317.07,1912.07 ; v1@2792.93,2397.93 cw(c2775.86,2380.86) 2800,2380.86 cw(c2824.14,2380.86) v1@2807.07,2397.93
TXD_M1: J10.3 U12.8 | length 1439.8
  Top Layer w10: v1@290,3055 cw(c290,3030.86) 307.07,3047.93 cw(c324.14,3065) v1@300,3065 ; v1(290,3065) 410,2945 410,2785 515,2680 915,2680 944.83,2709.83 U12.8@944.83,2760.14 ; U12.8@939.88,2755.19 cw(c927.93,2743.24) 944.83,2743.24 cw(c961.73,2743.24) U12.8@949.78,2755.19
  Bottom Layer w10: J10.3@272.32,3262.32 cw(c229.64,3219.64) 290,3219.64 cw(c350.36,3219.64) J10.3@307.68,3262.32 ; J10.3@279.39,3269.39 cw(c253.79,3243.79) 290,3243.79 cw(c326.21,3243.79) J10.3@300.61,3269.39 ; v1@282.93,3072.07 ccw(c265.86,3089.14) 290,3089.14 ccw(c314.14,3089.14) v1@297.07,3072.07 ; v1(290,3065) J10.3@290,3280
TXD_M2: J9.2 U12.13 | length 1359.8
  Top Layer w10: v1(1075,2955) 1080.14,2960.14 U12.13@1164.83,2960.14 ; v1@1082.07,2947.93 cw(c1111.55,2918.45) 1111.55,2960.14 ; U12.13@1122.67,2955.19 ccw(c1110.72,2943.24) 1110.72,2960.14 ccw(c1110.72,2977.04) U12.13@1122.67,2965.09
  Bottom Layer w10: J9.2@208.43,2860 cw(c208.43,2799.64) 251.1,2842.32 cw(c293.78,2885) J9.2@233.43,2885 ; J9.2@208.43,2870 cw(c208.43,2833.79) 234.03,2859.39 cw(c259.64,2885) J9.2@223.43,2885 ; J9.2@208.43,2885 318.43,2775 950,2775 1075,2900 v1(1075,2955) ; v1@1067.93,2947.93 cw(c1050.86,2930.86) 1075,2930.86 cw(c1099.14,2930.86) v1@1082.07,2947.93
TXD_M3: J11.2 U11.8 | length 1063.3
  Top Layer w10: J11.2@208.43,2465 cw(c208.43,2404.64) 251.1,2447.32 cw(c293.78,2490) J11.2@233.43,2490 ; J11.2@208.43,2475 cw(c208.43,2438.79) 234.03,2464.39 cw(c259.64,2490) J11.2@223.43,2490 ; J11.2@208.43,2490 506.01,2192.41 927.24,2192.41 939.83,2205 U11.8@939.83,2230.14 ; U11.8@934.88,2225.19 cw(c922.93,2213.24) 939.83,2213.24 cw(c956.73,2213.24) U11.8@944.78,2225.19
TXD_M4: J12.2 U11.13 | length 1391.5
  Top Layer w10: J12.2@208.43,2105 261.84,2158.41 992.46,2158.41 1042,2207.96 1042,2425 1047.14,2430.14 U11.13@1159.83,2430.14 ; J12.2@208.43,2120 ccw(c208.43,2156.21) 234.03,2130.61 ccw(c259.64,2105) J12.2@223.43,2105 ; J12.2@208.43,2130 ccw(c208.43,2190.36) 251.1,2147.68 ccw(c293.78,2105) J12.2@233.43,2105 ; U11.13@1117.67,2425.19 ccw(c1105.72,2413.24) 1105.72,2430.14 ccw(c1105.72,2447.04) U11.13@1117.67,2435.09
TXD_M5: J13.2 U10.8 | length 853.2
  Top Layer w10: J13.2@232.9,1685 232.9,1637.1 240,1630 895,1630 939.83,1674.83 U10.8@939.83,1725.14 ; U10.8@934.88,1720.19 cw(c922.93,1708.24) 939.83,1708.24 cw(c956.73,1708.24) U10.8@944.78,1720.19
V_CHECK_1: U5.2 U17.1 | length 2296.2
  Top Layer w10: U5.2@2646.54,2862.24 2646.54,2961.54 2672,2987 4112,2987 4125,3000 v2(4125,3140) ; U17.1@4040,3400 4110,3400 v1(4115,3395) ; U17.1@4072.95,3395.05 cw(c4084.9,3383.1) 4084.9,3400 cw(c4084.9,3416.9) U17.1@4072.95,3404.95 ; U17.1@4078.79,3400 cw(c4078.79,3358.79) v1@4107.93,3387.93 ; v2@4116.16,3131.16 cw(c4094.82,3109.82) 4125,3109.82 cw(c4155.18,3109.82) v2@4133.84,3131.16
  Bottom Layer w10: v1@4107.93,3387.93 cw(c4066.72,3346.72) 4125,3346.72 ; v2@4116.16,3148.84 ccw(c4094.82,3170.18) 4125,3170.18 ccw(c4155.18,3170.18) v2@4133.84,3148.84 ; v2(4125,3140) 4125,3385 v1(4115,3395) cw(c4090.86,3370.86) 4125,3370.86
V_CHECK_2: U5.1 U17.7 | length 2251.9
  Top Layer w10: U5.1@2666.22,2862.24 2666.22,2931.22 2705,2970 4330,2970 4355,2995 4355,3335 4340,3350 U17.7@4260,3350 ; U17.7@4292.95,3345.05 cw(c4304.9,3333.1) 4304.9,3350 cw(c4304.9,3366.9) U17.7@4292.95,3354.95
VCC3V3: C1.1 C3.1 C5.2 C9.1 C11.1 C14.1 C18.1 C20.1 C26.1 C29.1 C50.2 C52.2 C54.2 C56.2 C58.1 C59.1 C60.1 C61.1 DS1.1 DS1.6 J7.1 J7.2 pad.1@2720,1620 Q2.2 R1.1 R2.1 R3.1 R4.1 R5.1 R6.1 R7.1 R8.1 R13.2 R15.1 R17.1 R18.1 R19.1 R20.1 R21.1 R22.1 R58.2 R59.1 U1.4 U5.6 U5.11 U5.21 U5.22 U5.28 U5.50 U5.75 U5.100 U6.2 U6.4 U7.3 U7.7 U7.8 U10.16 U11.16 U12.16 U13.16 | length 10226.8
  Top Layer w10: Q2.2@2006.29,3670.95 cw(c1984.1,3648.76) 2015.48,3648.76 cw(c2046.86,3648.76) Q2.2@2024.67,3670.95 ; v1@2007.93,3642.07 ccw(c1989.7,3660.3) 2015.48,3660.3 ; v1@2008.44,3642.55 ccw(c1998.63,3653.84) 2013.08,3657.72 ; v1@2010,3643.66 ccw(c2003.22,3655.41) 2016.32,3651.9 ; v1(2015,3635) 2015.48,3635.48 Q2.2@2015.48,3680.14 ; 2015.48,3657.98 ccw(c2037.98,3657.98) v1@2022.07,3642.07 ; 2018.3,3659.27 ccw(c2036.72,3654.33) v1@2022.47,3641.65 ; U5.50@2132.76,2328.78 2253.78,2328.78 v1(2280,2355) ; U5.28@2132.76,2761.85 2241.85,2761.85 v1(2245,2765) ; 2213.25,2761.85 ccw(c2213.25,2796.75) v1@2237.93,2772.07 ; 2228.46,2761.85 cw(c2228.46,2748.46) v1@2237.93,2757.93 ; U5.22@2252.83,2862.24 U5.21@2272.52,2862.24 2272.52,2817.48 2322.5,2767.5 2322.5,2762.5 v1(2315,2755) ccw(c2266.72,2755) 2300.86,2789.14 ; v1@2270,2355 cw(c2245.86,2355) 2262.93,2337.93 cw(c2280,2320.86) v1@2280,2345 ; 2283.79,2806.21 cw(c2232.57,2755) v1@2305,2755 ; 2317.93,2772.07 cw(c2300.86,2755) v1@2325,2755 ; v1@2462.93,2772.07 ccw(c2447.38,2787.62) 2469.37,2787.62 ; 2469.37,2790.66 ccw(c2495.66,2790.66) v1@2477.07,2772.07 ; 2469.37,2825 2469.37,2765.63 v1(2470,2765) ; v1@2557.93,2777.07 ccw(c2534.11,2800.89) 2567.8,2800.89 ; v1(2565,2770) 2567.8,2772.8 U5.6@2567.8,2862.24 ; 2567.8,2787.39 ccw(c2582.39,2787.39) v1@2572.07,2777.07 ; v1@2615,2355 cw(c2615,2306.72) 2649.14,2340.86 ; 2632.07,2357.93 ccw(c2615,2340.86) v1(2615,2365) 2620,2360 2630,2360 2666.22,2323.78 U5.75@2666.22,2267.76 ; v1(2635,2770) 2666.22,2801.22 U5.100@2727.24,2801.22 ; v1@2635,2780 ccw(c2635,2804.14) 2652.07,2787.07 ccw(c2669.14,2770) v1@2645,2770
  Top Layer w20: C56.2@770,3570 v1(840,3570) ; C52.2@775,2555 835,2555 v1@840,2560 ; C54.2@775,3050 813.14,3088.14 v1@835,3088.14 ; C54.2@775,3070 ccw(c775,3118.28) 809.14,3084.14 ; C50.2@780,2045 782.14,2047.14 842.14,2047.14 v1@845,2050 ; C56.2@780.61,3559.39 cw(c806.21,3533.79) 806.21,3570 cw(c806.21,3606.21) C56.2@780.61,3580.61 ; C52.2@785.61,2544.39 cw(c811.21,2518.79) 811.21,2555 cw(c811.21,2591.21) C52.2@785.61,2565.61 ; C54.2@790,3055 cw(c814.14,3055) C54.2@797.07,3072.07 ; C50.2@790.61,2034.39 cw(c821.38,2003.62) 821.38,2047.14 ; C50.2@790.61,2055.61 ccw(c811.04,2076.04) 811.04,2047.14 ; 806.89,2047.14 ccw(c806.89,2103.11) v1@846.46,2063.54 ; 820.86,2555 ccw(c820.86,2584.14) v1@841.46,2563.54 ; 828.44,3088.14 ccw(c828.44,3106.56) v1@841.46,3093.54 ; v1(1080,3105) 1085.14,3110.14 U12.16@1164.83,3110.14 1289.86,3110.14 ; v1@1083.54,3101.46 cw(c1104.48,3080.52) 1104.48,3110.14 ; U13.16@1159.83,3575.14 1304.86,3575.14 1335,3545 C61.1@1335,3510 ; C60.1@1292.94,3068.91 ccw(c1267.46,3087.74) 1289.86,3110.14 ; C60.1@1301,3072 ccw(c1287.5,3090) 1310,3090 ; 1306.28,3093.72 cw(c1286.35,3073.78) C60.1@1309.02,3057.03 ; C60.1@1310,3060 1310,3090 ; C60.1@1319,3072 cw(c1332.5,3090) 1310,3090 ; C61.1@1324.39,3510.61 ccw(c1298.79,3536.21) 1335,3536.21 ccw(c1371.21,3536.21) C61.1@1345.61,3510.61 ; v1(2453.35,4400) 2453.35,4386.65 2485,4355 2550,4355 2585,4320 R15.1@2585,4229.07 ; v1@2458.35,4400 ccw(c2502.64,4400) 2471.32,4368.68 ; R15.1@2574.39,4244.68 ccw(c2548.79,4270.28) 2585,4270.28 ccw(c2621.21,4270.28) R15.1@2595.61,4244.68 ; 1289.86,3110.14 1310,3090
  Top Layer w30: U10.16@1159.83,2075.14 1159.83,2109.83 1190,2140 1255,2140 C58.1@1305,2090 ; 1175.86,2125.86 cw(c1210,2091.72) v1(1210,2140) ; 1279.39,2115.61 ccw(c1305,2141.21) C58.1@1305,2105 ; v1(1650,1775) R8.1@1650,1905 ; v1(2020,1785) R7.1@2020,1875
  Top Layer w40: U11.16@1159.83,2580.14 1165,2585.31 v1(1165,2630) C59.1@1330,2630 1330,2710 1355,2735 U7.3@1440,2735 1545,2735 ; C29.1@1555,2580 1555,2725 1545,2735 ; 1665,3537.75 cw(c1727.25,3537.75) v2@1683.23,3581.77 ; 1665,3551.72 cw(c1699.11,3551.72) v2@1683.88,3582.24 ; U7.7@1677.5,2790.66 ccw(c1630.8,2743.96) 1630.8,2810 ccw(c1630.8,2876.04) U7.8@1677.5,2829.34 ; v2(1685,3580) 1665,3560 R58.2@1665,3495 R59.1@1770,3495 ; U7.7@1699.84,2785 1699.84,2810 ; U7.8@1699.84,2835 1699.84,2810 ; v1(2000,3195) 2000.48,3195.48 U1.4@2000.48,3270.07 ; R13.2@2380,3380 v1(2380,3535) ; 1545,2735 1620,2810 1699.84,2810
  Top Layer w50: R17.1@3700,755 R18.1@3700,860 R19.1@3700,965 R20.1@3700,1070 R21.1@3700,1175 R22.1@3700,1280 v1(3700,1405)
  Top Layer w60: U6.2@2225,4520 U6.4@2453.35,4520 ; v1(2450,4675) 2455,4675 2453.35,4673.35 U6.4@2453.35,4520 ; U6.4@2451.7,4549.27 ccw(c2469.37,4615.22) 2503.51,4556.09 ; v1(2453.35,4400) U6.4@2453.35,4520 ; U6.4@2453.35,4549.06 ccw(c2453.35,4619.2) 2502.95,4569.6 ; U6.4@2470.22,4536.88 cw(c2561.22,4445.88) C18.1@2561.22,4574.57 ; C18.1@2592.62,4576.16 cw(c2698.46,4470.32) C20.1@2698.46,4620 ; C18.1@2594.21,4580 cw(c2640.59,4580) C18.1@2607.8,4612.8 ; DS1.6@3470,4230 3405,4230 3325,4310 3325,4595 3290,4630 DS1.1@3170,4630 3160,4620 C26.1@2810,4620 C20.1@2705,4620 2615,4620 C18.1@2575,4580 2513.35,4580 U6.4@2453.35,4520
  Bottom Layer w10: v1@2242.41,2755.34 cw(c2236.16,2732.02) 2257.07,2744.09 cw(c2277.98,2756.16) v1@2254.66,2762.41 ; v1@2245,2755 cw(c2245,2730.86) 2262.07,2747.93 cw(c2279.14,2765) v1@2255,2765 ; 2259.65,2750.35 cw(c2221.57,2712.28) C9.1@2275.07,2706.14 ; C9.1@2265.13,2707.28 ccw(c2195.3,2715.3) v1(2245,2765) 2285,2725 C9.1@2285,2700 ; C1.1@2265.86,2405.86 cw(c2231.72,2371.72) 2280,2371.72 cw(c2328.28,2371.72) C1.1@2294.14,2405.86 ; v1@2272.93,2362.07 ccw(c2255.86,2379.14) 2280,2379.14 ccw(c2304.14,2379.14) v1@2287.07,2362.07 ; 2274.29,2735.71 cw(c2247.85,2709.27) C9.1@2285,2705 ; v1(2280,2355) C1.1@2280,2420 ; v1(2315,2755) 2365,2755 2375,2745 ; v1@2322.07,2747.93 cw(c2339.14,2730.86) 2339.14,2755 cw(c2339.14,2779.14) v1@2322.07,2762.07 ; C11.1@2363,2721 ccw(c2345,2745) 2375,2745 ; C11.1@2375,2700 2375,2745 ; C11.1@2387,2721 cw(c2405,2745) 2375,2745 ; C5.2@2455.86,2719.14 ccw(c2421.72,2753.28) 2470,2753.28 ccw(c2518.28,2753.28) C5.2@2484.14,2719.14 ; v1@2461.39,2759.92 cw(c2432.51,2742.89) 2464.89,2734.22 ; v1@2462.93,2757.93 cw(c2445.86,2740.86) 2470,2740.86 cw(c2494.14,2740.86) v1@2477.07,2757.93 ; v1@2465,2756.34 cw(c2458.11,2744.4) 2471.42,2747.97 ; 2468.58,2747.97 cw(c2481.89,2744.4) v1@2475,2756.34 ; C5.2@2470,2700 v1(2470,2765) ; 2475.11,2734.22 cw(c2507.49,2742.89) v1@2478.61,2759.92 ; C14.1@2551.6,2719.85 ccw(c2524.38,2750) 2565,2750 ; v1@2557.93,2762.93 cw(c2540.86,2745.86) 2565,2745.86 cw(c2589.14,2745.86) 2572.07,2762.93 cw(c2589.14,2745.86) 2589.14,2770 cw(c2589.14,2794.14) v1@2572.07,2777.07 ; C14.1@2565,2700 2565,2750 ; v1(2565,2770) 2565,2750 ; v1@2573,2764 cw(c2585,2755) 2585,2770 ; v1@2573,2776 ccw(c2585,2785) 2585,2770 ; C14.1@2578.4,2719.85 cw(c2605.62,2750) 2565,2750 ; C3.1@2605.86,2420.86 cw(c2571.72,2386.72) 2620,2386.72 cw(c2668.28,2386.72) C3.1@2634.14,2420.86 ; v1@2607.93,2372.07 ccw(c2578.79,2401.21) 2620,2401.21 ; 2620,2380 C3.1@2620,2435 ; v1@2627.93,2762.93 ccw(c2610.86,2745.86) 2610.86,2770 ccw(c2610.86,2794.14) v1@2627.93,2777.07 ; v1(2635,2770) 2585,2770 ; 2565,2750 cw(c2580,2750) 2571,2762 ccw(c2580,2750) 2565,2750 ; 2565,2750 ccw(c2550,2750) 2559,2762 cw(c2550,2750) 2565,2750 ; 2565,2750 2585,2770
  Bottom Layer w40: C9.1@2285,2700 C11.1@2375,2700
  Bottom Layer w50: R1.1@3970,745 R2.1@3970,845 R3.1@3970,945 R4.1@3970,1045 R5.1@3970,1145 R6.1@3970,1245 v1(3970,1425)
  other v1: 850,2060 845,2560 1235,2630 845,3090 1260,3575 2453.35,4435 2295,4520 2339.17,4520 2375,4520 2455,4625
pads on no net: J7.11 J7.17 J7.19 K1.0 K2.0 K3.0 U1.1 U5.13 U5.33 U5.34 U5.35 U5.73 U5.81 U5.82 U5.84 U9.9 U10.11 U10.12 U10.13 U10.14 U13.7 U13.10 U13.11 U13.14 U16.3 U16.18

## Polygon pours and split planes (outlines as drawn)
AGND on GND (split plane): 4475,4475 4704.31,4475 4704.31,1515.1 3475.1,1515.1 3475.1,3034.9 4095,3034.9 4098.92,3035.29 4102.69,3036.43 4106.17,3038.29 4109.21,3040.79 4111.71,3043.83 4113.57,3047.31 4114.71,3051.08 4115.1,3055 4115.1,3430 4115.1,3505 4114.71,3508.92 4113.57,3512.69 4111.71,3516.17 4109.21,3519.21 4089.21,3539.21 4086.17,3541.71 4082.69,3543.57 4078.92,3544.71 4075,3545.1 3615.1,3545.1 3615.1,4704.31 3816.87,4704.31 3818.83,4702.7 3822.31,4700.84 3826.08,4699.7 3830,4699.31 3833.92,4699.7 3837.69,4700.84 3841.17,4702.7 3843.13,4704.31 4475,4704.31
GND on GND (split plane): 3574.9,3535 3575.29,3531.08 3576.43,3527.31 3578.29,3523.83 3580.79,3520.79 3590.79,3510.79 3593.83,3508.29 3597.31,3506.43 3601.08,3505.29 3605,3504.9 4066.68,3504.9 4074.9,3496.68 4074.9,3430 4074.9,3425 4074.9,3075.1 3455,3075.1 3451.08,3074.71 3447.31,3073.57 3443.83,3071.71 3440.79,3069.21 3438.29,3066.17 3436.43,3062.69 3435.29,3058.92 3434.9,3055 3434.9,1490 3435.29,1486.08 3436.43,1482.31 3438.29,1478.83 3440.79,1475.79 3443.83,1473.29 3447.31,1471.43 3451.08,1470.29 3455,1469.9 3458.92,1470.29 3462.69,1471.43 3466.17,1473.29 3468.13,1474.9 4704.31,1474.9 4704.31,250 4475,250 4475,20.1 250,20.1 250,250 20.1,250 20.1,4475 250,4475 250,4704.31 3574.9,4704.31
VCC3V3 on VCC (split plane): 2504.9,4000 2505.29,3996.08 2506.43,3992.31 2508.29,3988.83 2510.79,3985.79 2513.83,3983.29 2517.31,3981.43 2521.08,3980.29 2525,3979.9 3294.9,3979.9 3294.9,3055 3295.29,3051.08 3296.43,3047.31 3298.29,3043.83 3300.79,3040.79 3303.83,3038.29 3307.31,3036.43 3311.08,3035.29 3315,3034.9 4189.9,3034.9 4189.9,2995 4190.29,2991.08 4191.43,2987.31 4193.29,2983.83 4194.9,2981.87 4194.9,763.37 4194.21,764.21 4191.17,766.71 4187.69,768.57 4183.92,769.71 4180,770.1 4176.08,769.71 4172.31,768.57 4168.83,766.71 4165.79,764.21 4161.68,760.1 3595.1,760.1 3595.1,1540 3594.71,1543.92 3593.57,1547.69 3591.71,1551.17 3589.21,1554.21 3564.21,1579.21 3561.17,1581.71 3557.69,1583.57 3553.92,1584.71 3550,1585.1 835,1585.1 831.08,1584.71 827.5,1583.62 823.92,1584.71 820,1585.1 715.1,1585.1 715.1,1661.87 716.71,1663.83 718.57,1667.31 719.71,1671.08 720.1,1675 720.1,3619.9 1305,3619.9 1308.92,3620.29 1312.69,3621.43 1316.17,3623.29 1319.21,3625.79 1359.21,3665.79 1361.71,3668.83 1363.57,3672.31 1364.71,3676.08 1365.1,3680 1365.1,4215 1365.1,4704.31 2504.9,4704.31
+5V on VCC (split plane): 4475,4475 4704.31,4475 4704.31,250 4475,250 4475,20.1 305.1,20.1 305.1,609.9 835,609.9 838.92,610.29 842.69,611.43 846.17,613.29 849.21,615.79 851.71,618.83 853.57,622.31 854.71,626.08 855.1,630 855.1,1544.9 3541.68,1544.9 3554.9,1531.68 3554.9,740 3555.29,736.08 3556.43,732.31 3558.29,728.83 3560.79,725.79 3563.83,723.29 3567.31,721.43 3571.08,720.29 3575,719.9 4205,719.9 4208.92,720.29 4212.69,721.43 4216.17,723.29 4219.21,725.79 4229.21,735.79 4231.71,738.83 4233.57,742.31 4234.71,746.08 4235.1,750 4235.1,3025 4234.71,3028.92 4233.57,3032.69 4231.71,3036.17 4230.1,3038.13 4230.1,3050 4229.71,3053.92 4228.57,3057.69 4226.71,3061.17 4224.21,3064.21 4219.21,3069.21 4216.17,3071.71 4212.69,3073.57 4208.92,3074.71 4205,3075.1 3335.1,3075.1 3335.1,4000 3334.71,4003.92 3333.57,4007.69 3331.71,4011.17 3329.21,4014.21 3326.17,4016.71 3322.69,4018.57 3318.92,4019.71 3315,4020.1 2545.1,4020.1 2545.1,4701.08 2548.32,4704.31 4475,4704.31
+24V on VCC (split plane): 1324.9,4215 1324.9,3688.32 1296.68,3660.1 700,3660.1 696.08,3659.71 692.31,3658.57 688.83,3656.71 685.79,3654.21 683.29,3651.17 681.43,3647.69 680.29,3643.92 679.9,3640 679.9,1683.13 678.29,1681.17 676.43,1677.69 675.29,1673.92 674.9,1670 674.9,1565 675.29,1561.08 676.43,1557.31 678.29,1553.83 680.79,1550.79 683.83,1548.29 687.31,1546.43 691.08,1545.29 695,1544.9 811.68,1544.9 814.9,1541.68 814.9,650.1 280,650.1 276.08,649.71 272.31,648.57 268.83,646.71 265.79,644.21 263.29,641.17 261.43,637.69 260.29,633.92 259.9,630 260.29,626.08 261.43,622.31 263.29,618.83 264.9,616.87 264.9,20.1 250,20.1 250,250 20.1,250 20.1,4470 255,4470 255,4704.31 1324.9,4704.31

## Other copper
Top Layer:
  rectangle net +24V: 1050,3680 1180,3795
  rectangle net GND: 40,4005 890,4200
  rectangle net NetC7_1: 590,4460 1020,4705
  rectangle net +24VIN: 330,4250 500,4710
  rectangle net +24VIN: 25,4235 475,4410
GND (plane layer: these items are gaps in the copper):
  rectangle: 4475,15 4715,250
  rectangle: 5,20 250,250
  rectangle: 0,4475 250,4724.41
  rectangle: 4475,4475 4725,4724.41
  lines w40: 3455,1490 3455,3055 4095,3055 4095,3430 ; 3455,1495 4015,1495 ; 3595,4725 3595,3535 3605,3525 3830,3525 ; 3820,3525 4075,3525 4095,3505 4095,3425 ; 3830,4719.41 3835,4724.41 ; 3990,1495 4705,1495
VCC (plane layer: these items are gaps in the copper):
  rectangle: 4475,4475 4725,4735
  rectangle: 4475,0 4724.41,250
  rectangle: 5,15 250,250
  rectangle: 10,4470 255,4724.41
  lines w40: 280,630 835,630 835,1565 2435,1565 ; 285,20 285,630 ; 835,1550 820,1565 695,1565 695,1670 700,1675 700,3640 1305,3640 1345,3680 1345,4215 1345,4715 1340,4720 ; 2375,1565 3550,1565 3575,1540 3575,740 4170,740 ; 2540,4724.41 2525,4709.41 2525,4000 3315,4000 3315,3055 4205,3055 4210,3050 4210,2995 ; 4180,750 4170,740 ; 4215,3025 4215,750 4205,740 4170,740

## Silkscreen, mask and mechanical layers (free items; w line width, h text height)
Top Overlay:
  lines w10: 5,250 225,250 250,250 250,215 250,5 ; 5,4475 250,4475 250,4725 ; 4475,5 4475,250 4725,250 ; 4475,4720 4475,4475 4725,4475
  text "24V" at 465,4325 h30
  text "GND" at 455,4140 h30
  text "24V" at 2130,4000 h30
  text "5V" at 2415,3995 h30
  text "3.3V" at 2635,3995 h30
  text "24V" at 320,3905 h30
  text "24V" at 320,3820 h30
  text "GND" at 315,3675 h30
  text "GND" at 315,3580 h30
  text "24VA" at 3065,3535 h60
  text "24V" at 435,2890 h60
  text "3.3V" at 2645,1545 h60
  text "GND" at 2775,1540 h30
  text "5V" at 2610,1400 h60
Mechanical 13:
  lines w10: 4724.41,0 0,0 0,4724.41 4724.41,4724.41 ; 4724.41,5 4724.41,4729.41

## Dimensions
4606.3,4606.3 to 118.11,4606.3 on Top Overlay
0,0 to 4724.41,5 on Top Overlay
4606.3,118.11 to 4606.3,4606.3 on Top Overlay
0,4724.41 to 0,0 on Top Overlay

## Text inside footprints (layer, text, board x,y; h text height)
J1: Top Overlay "16" at 140,1375 h50 r90; Top Overlay "15" at 255,1380 h50 r90; Top Overlay "1" at 230,605 h50 r90; Top Overlay "2" at 145,590 h50 r90
J3: Top Overlay "1" at 150.27,3985.67 h40 r90
J4: Top Overlay "2" at 3475,170 h50; Top Overlay "1" at 3490,85 h50; Top Overlay "17" at 4335,55 h50; Top Overlay "18" at 4335,180 h50
J5: Top Overlay "2" at 2455,170 h50; Top Overlay "1" at 2470,85 h50; Top Overlay "17" at 3315,55 h50; Top Overlay "18" at 3315,180 h50
J6: Top Overlay "2" at 1400,175 h50; Top Overlay "1" at 1415,90 h50; Top Overlay "17" at 2260,60 h50; Top Overlay "18" at 2260,185 h50
J8: Top Overlay "2" at 335,180 h50; Top Overlay "1" at 350,95 h50; Top Overlay "17" at 1195,65 h50; Top Overlay "18" at 1195,190 h50
J10: Top Overlay "1" at -24.96,3181.57 h40 r180
J12: Top Overlay "1" at 44.33,2130.27 h40 r180
J13: Top Overlay "1" at 54.33,1720.27 h40 r180
J18: Top Overlay "1" at 4320.67,4584.73 h40
J20: Top Overlay "2" at 4575,1370 h50 r270; Top Overlay "1" at 4490,1355 h50 r270; Top Overlay "11" at 4465,745 h50 r270; Top Overlay "12" at 4570,745 h50 r270